# Altium PCB LineDetector.PcbDoc
Units mm, origin at the board's own origin, x right, y up, seen from the top; angles counter-clockwise.
Board outline 160 x 137.5 mm, 2 copper layers (Top Layer, Bottom Layer); 121 components, 71 nets, 295 pads, 0 vias.
Unrouted connection lines stored in the file: 198.
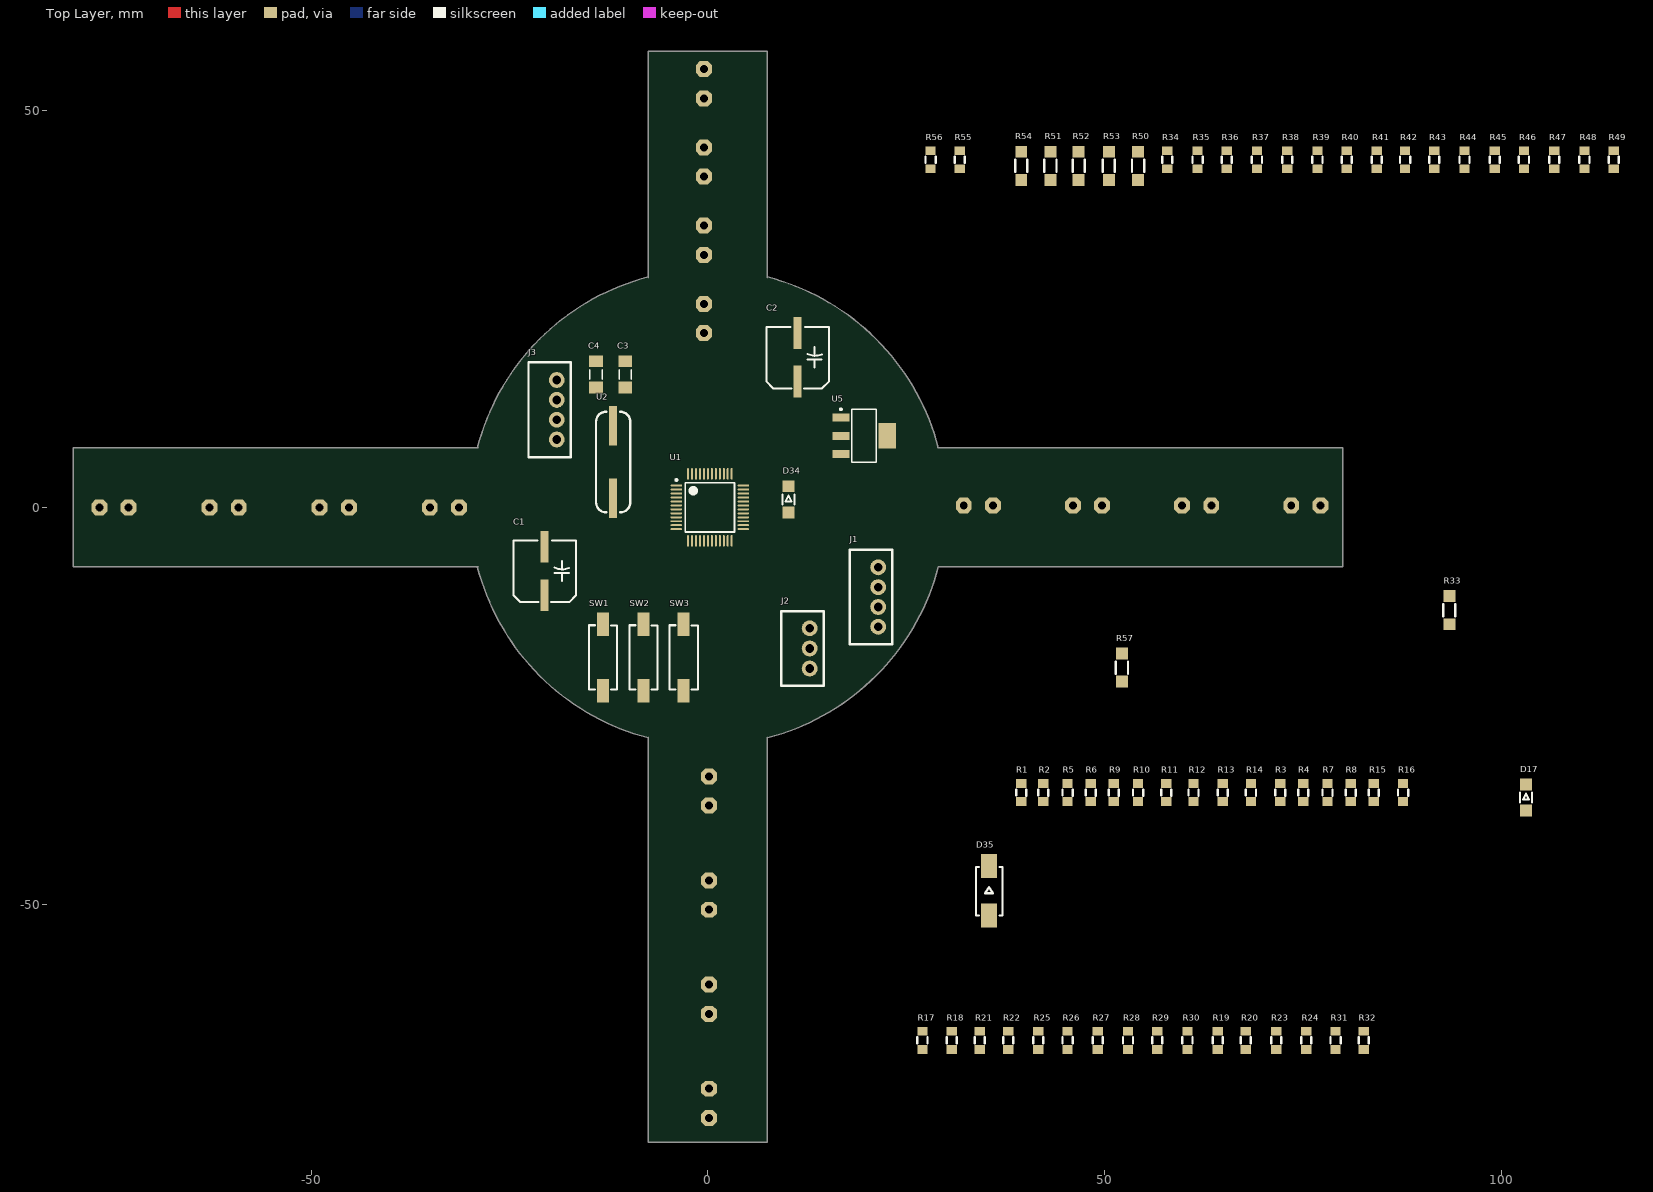
[diagram p0: Top Layer view]
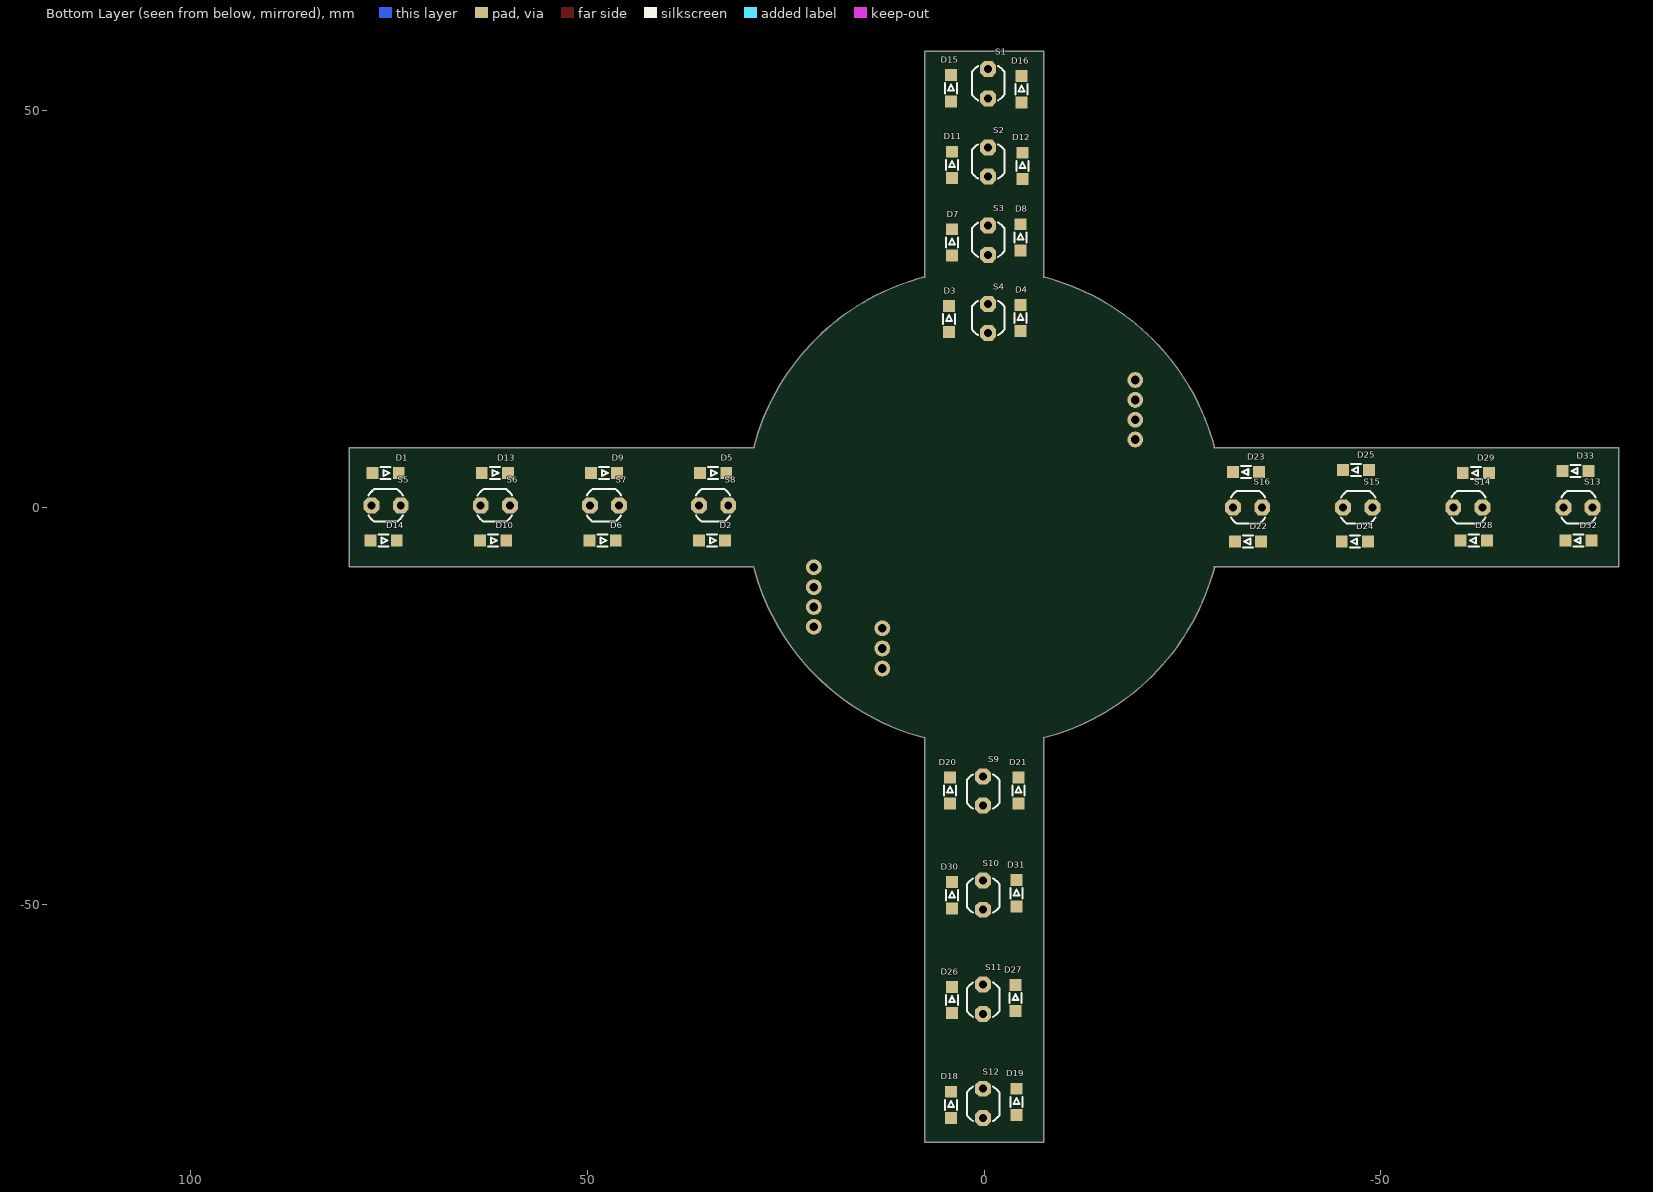
[diagram p1: Bottom Layer view, seen from below]

## Layer stack, top to bottom
Top Solder: solder mask 0.0102, Solder Resist, Dk 3.5
Top Layer: signal copper 0.0356
Dielectric 1: dielectric 0.32, FR-4, Dk 4.8
Bottom Layer: signal copper 0.0356
Bottom Solder: solder mask 0.0102, Solder Resist, Dk 3.5

## Board outline
-80,-7.5 -28.956,-7.5 -29.047,-7.5 ccw(c0,0) -7.491,-29.05 -7.5,-28.956 -7.5,-80 7.5,-80 7.5,-28.956 7.5,-29.047 ccw(c0,0) 29.05,-7.491 29.05,-7.5 80,-7.5 80,7.5 28.956,7.5 29.047,7.5 ccw(c0,0) 7.491,29.05 7.5,28.956 7.5,57.5 -7.5,57.5 -7.5,28.956 -7.5,29.047 ccw(c0,0) -29.05,7.491 -28.956,7.5 -80,7.5

## Design rules (kind name [scope] priority, off if disabled: settings)
Clearance [All] p1: gap=0.7 ignorepadtopadclearanceinfootprint=FALSE except(0: Arc-Hole Track-Hole SMDPad-Hole THPad-Hole Via-Hole Fill-Hole Poly-Hole Region-Hole Text-Hole; 0.25: Arc-Arc Arc-Track Arc-SMDPad Track-Track Track-SMDPad SMDPad-SMDPad; 0.254: Arc-THPad Arc-Via Arc-Text Track-THPad Track-Via Track-Text SMDPad-THPad SMDPad-Via SMDPad-Text THPad-THPad THPad-Via THPad-Text Via-Via Via-Text Fill-Text Poly-Text Region-Text Text-Text)
ComponentClearance [All] p1 off: gap=0.254 collisioncheckmode=3 verticalgap=0.254 showdistances=FALSE
Height [All] p1 off: minheight=0 maxheight=25.4 prefheight=12.7
PlaneConnect [All] p1: planeconnectstyle=Direct reliefexpansion=0.508 reliefentries=4 reliefconductorwidth=0.254 reliefairgap=0.254
PolygonConnect [All] p1: connectstyle=Direct reliefconductorwidth=0.254 reliefentries=4 polygonreliefangle="90 Angle" airgapwidth=0.254
RoutingVias [All] p1: holewidth=0.5 width=0.8 viastyle="Through Hole" minholewidth=0.5 minwidth=0.5 maxholewidth=0.5 maxwidth=1
SolderMaskExpansion [All] p1: expansion=0.102 istentingtop=FALSE
Width [All] p1: maxlimit=5 minlimit=0.25 preferedwidth=1
27 further rules are at their usual default settings.

## Components (designator, comment, footprint, x,y, rotation, side; value= is the part's Value field where it differs from the comment)
C1 "CAP" "CAP SMD 100uF 16V" -20.574,-8.001 r90 top
C2 "CAP" "CAP SMD 100uF 16V" 11.303,18.923 r90 top
C3 "CAP" CAP1206 -10.414,16.764 r90 top
C4 "CAP" CAP1206 -14.097,16.764 r90 top
D1 "LED" "LED RED 1206" 75.438,4.318 r180 bottom
D2 "LED" "LED RED 1206" 34.29,-4.191 r180 bottom
D3 "LED" "LED RED 1206" 4.445,23.749 r90 bottom
D4 "LED" "LED RED 1206" -4.572,23.876 r90 bottom
D5 "LED" "LED RED 1206" 34.163,4.318 r180 bottom
D6 "LED" "LED RED 1206" 48.091,-4.191 r180 bottom
D7 "LED" "LED RED 1206" 4.064,33.401 r90 bottom
D8 "LED" "LED RED 1206" -4.572,34.036 r90 bottom
D9 "LED" "LED RED 1206" 47.921,4.318 r180 bottom
D10 "LED" "LED RED 1206" 61.891,-4.191 r180 bottom
D11 "LED" "LED RED 1206" 4.064,43.18 r90 bottom
D12 "LED" "LED RED 1206" -4.826,43.053 r90 bottom
D13 "LED" "LED RED 1206" 61.68,4.318 r180 bottom
D14 "LED" "LED RED 1206" 75.692,-4.191 r180 bottom
D15 "LED" "LED RED 1206" 4.191,52.832 r90 bottom
D16 "LED" "LED RED 1206" -4.699,52.705 r90 bottom
D17 "LED" "LED GREEN 1206" 103.124,-36.576 r90 top
D18 "LED" "LED RED 1206" 4.191,-75.311 r90 bottom
D19 "LED" "LED RED 1206" -4.064,-74.93 r90 bottom
D20 "LED" "LED RED 1206" 4.318,-35.687 r90 bottom
D21 "LED" "LED RED 1206" -4.318,-35.687 r90 bottom
D22 "LED" "LED RED 1206" -33.274,-4.318 r0 bottom
D23 "LED" "LED RED 1206" -33.02,4.445 r0 bottom
D24 "LED" "LED RED 1206" -46.736,-4.318 r0 bottom
D25 "LED" "LED RED 1206" -46.863,4.699 r0 bottom
D26 "LED" "LED RED 1206" 4.064,-62.103 r90 bottom
D27 "LED" "LED RED 1206" -3.937,-61.849 r90 bottom
D28 "LED" "LED RED 1206" -61.722,-4.191 r0 bottom
D29 "LED" "LED RED 1206" -61.976,4.318 r0 bottom
D30 "LED" "LED RED 1206" 4.064,-48.895 r90 bottom
D31 "LED" "LED RED 1206" -4.064,-48.641 r90 bottom
D32 "LED" "LED RED 1206" -74.93,-4.191 r0 bottom
D33 "LED" "LED RED 1206" -74.549,4.572 r0 bottom
D34 "LED" "LED GREEN 1206" 10.16,1.016 r90 top
D35 "DIODE" Diode 35.433,-48.387 r90 top
J1 "XH4" "XH 4PIN" 20.574,-11.303 r90 top
J2 "XH3" "XH 3PIN" 11.938,-17.78 r90 top
J3 "XH4" "XH 4PIN" -19.939,12.302 r90 top
R1 "RES" RES805 39.497,-35.941 r90 top
R2 "RES" RES805 42.291,-35.941 r90 top
R3 "RES" RES805 72.136,-35.941 r90 top
R4 "RES" RES805 75.057,-35.941 r90 top
R5 "RES" RES805 45.339,-35.941 r90 top
R6 "RES" RES805 48.26,-35.941 r90 top
R7 "RES" RES805 78.105,-35.941 r90 top
R8 "RES" RES805 81.026,-35.941 r90 top
R9 "RES" RES805 51.181,-35.941 r90 top
R10 "RES" RES805 54.229,-35.941 r90 top
R11 "RES" RES805 57.785,-35.941 r90 top
R12 "RES" RES805 61.214,-35.941 r90 top
R13 "RES" RES805 64.897,-35.941 r90 top
R14 "RES" RES805 68.453,-35.941 r90 top
R15 "RES" RES805 83.947,-35.941 r90 top
R16 "RES" RES805 87.63,-35.941 r90 top
R17 "RES" RES805 27.051,-67.183 r90 top
R18 "RES" RES805 30.734,-67.183 r90 top
R19 "RES" RES805 64.262,-67.183 r90 top
R20 "RES" RES805 67.818,-67.183 r90 top
R21 "RES" RES805 34.29,-67.183 r90 top
R22 "RES" RES805 37.846,-67.183 r90 top
R23 "RES" RES805 71.628,-67.183 r90 top
R24 "RES" RES805 75.438,-67.183 r90 top
R25 "RES" RES805 41.656,-67.183 r90 top
R26 "RES" RES805 45.339,-67.183 r90 top
R27 "RES" RES805 49.149,-67.183 r90 top
R28 "RES" RES805 52.959,-67.183 r90 top
R29 "RES" RES805 56.642,-67.183 r90 top
R30 "RES" RES805 60.452,-67.183 r90 top
R31 "RES" RES805 79.121,-67.183 r90 top
R32 "RES" RES805 82.677,-67.183 r90 top
R33 "RES" RES1206 93.472,-12.954 r90 top
R34 "RES" RES805 57.912,43.815 r90 top
R35 "RES" RES805 61.722,43.815 r90 top
R36 "RES" RES805 65.405,43.815 r90 top
R37 "RES" RES805 69.215,43.815 r90 top
R38 "RES" RES805 73.025,43.815 r90 top
R39 "RES" RES805 76.835,43.815 r90 top
R40 "RES" RES805 80.518,43.815 r90 top
R41 "RES" RES805 84.328,43.815 r90 top
R42 "RES" RES805 87.884,43.815 r90 top
R43 "RES" RES805 91.567,43.815 r90 top
R44 "RES" RES805 95.377,43.815 r90 top
R45 "RES" RES805 99.187,43.815 r90 top
R46 "RES" RES805 102.87,43.815 r90 top
R47 "RES" RES805 106.68,43.815 r90 top
R48 "RES" RES805 110.49,43.815 r90 top
R49 "RES" RES805 114.173,43.815 r90 top
R50 "RES" RES1206 54.229,43.053 r90 top
R51 "10K" RES1206 43.18,43.053 r90 top
R52 "10K" RES1206 46.736,43.053 r90 top
R53 "10K" RES1206 50.546,43.053 r90 top
R54 "RES" RES1206 39.497,43.053 r90 top
R55 "RES" RES805 31.75,43.815 r90 top
R56 "RES" RES805 28.067,43.815 r90 top
R57 "RES" RES1206 52.197,-20.193 r90 top
S1 "LDR" LDR -0.508,53.467 r270 bottom
S2 "LDR" LDR -0.508,43.603 r270 bottom
S3 "LDR" LDR -0.508,33.74 r270 bottom
S4 "LDR" LDR -0.508,23.876 r270 bottom
S5 "LDR" LDR 75.438,0.254 r180 bottom
S6 "LDR" LDR 61.68,0.254 r180 bottom
S7 "LDR" LDR 47.921,0.254 r180 bottom
S8 "LDR" LDR 34.163,0.254 r180 bottom
S9 "LDR" LDR 0.127,-35.814 r90 bottom
S10 "LDR" LDR 0.127,-48.937 r90 bottom
S11 "LDR" LDR 0.127,-62.061 r90 bottom
S12 "LDR" LDR 0.127,-75.184 r90 bottom
S13 "LDR" LDR -74.93,0 r0 bottom
S14 "LDR" LDR -61.045,0 r0 bottom
S15 "LDR" LDR -47.159,0 r0 bottom
S16 "LDR" LDR -33.274,0 r0 bottom
SW1 "Switch" pushbutton -13.208,-18.923 r90 top
SW2 "Switch" pushbutton -8.128,-18.923 r90 top
SW3 "Switch" pushbutton -3.048,-18.923 r90 top
U1 "STM32F103C8T6" STM32F103C8T6 0.254,0 r0 top
U2 "Oscilator" "Crystal Oscilator" -11.938,5.715 r270 top
U5 "1117" AMS1117 19.685,9.017 r0 top

## Footprints (in the part's own frame and the unit in brackets; to place one, negate y for a bottom-side part, rotate by r counter-clockwise, add the part's x,y. Pads: shape width x height; smd on the part's side, far side on the other; paste and mask are expansions set on the pad)
AMS1117 [mm] "SOT223, 4-Leads, Body 6.30x7.00mm (avg), Pitch 2.30mm, IPC Medium Density"
  rect 2.15x1 smd: 1(-2.925,2.3) 2(-2.925,0) 3(-2.925,-2.3)
  rect 2.15x3.25 smd: 4(2.925,0)
  silkscreen extent -3.05,-3.35 1.55,3.47, body extent -3.5,-3.35 3.5,3.35, height 1.65
CAP1206 [mm] "Chip Capacitor, 2-Leads, Body 3.20x1.60mm, IPC Medium Density"
  rect 1.5x1.75 smd: 1(-1.651,0) 2(1.651,0)
  silkscreen extent -0.6,-0.77 0.6,0.77, body extent -1.6,-0.8 1.6,0.8, height 1
"CAP SMD 100uF 16V" [mm]
  rect 4x1 smd: 1(3.048,0) 2(-3.07,-0.003)
  silkscreen extent -3.94,-3.97 3.81,3.94, body extent -4.75,-4.15 4.75,4.15, height 10.51
"Crystal Oscilator" [mm]
  rect 5x1 smd: 1(-4.572,0) 2(4.572,0)
  silkscreen extent -6.35,-2.16 6.35,2.16, body extent -6.5,-2.35 6.5,2.35, height 4.21
Diode [mm]
  rect 3x2 smd: 1(-3.048,0) 2(3.175,0)
  silkscreen extent -3.06,-1.69 3.05,1.65, body extent -3.12,-1.78 3.12,1.78, height 2.26
LDR [mm]
  oct 2x2 hole 1: 1(-1.778,0) 2(1.905,0)
  silkscreen extent -2.15,-2.03 2.15,2.03, body extent -2.5,-2.15 2.5,2.15, height 2.9
"LED GREEN 1206" [mm]
  rect 1.5x1.5 smd: 1(-1.651,0) 2(1.651,0)
  silkscreen extent -0.64,-0.76 0.64,0.76, body extent -1.63,-0.83 1.64,0.82, height 0.9
"LED RED 1206" [mm]
  rect 1.5x1.5 smd: 1(-1.651,0) 2(1.651,0)
  silkscreen extent -0.64,-0.76 0.64,0.76, body extent -1.63,-0.83 1.64,0.82, height 0.9
pushbutton [mm]
  rect 3x1.5 smd: 1(-4.191,0) 2(4.191,0)
  silkscreen extent -4.06,-1.78 4.06,1.78, body extent -4.17,-1.82 4.17,1.82, height 4.25
RES805 [mm]
  rect 1.1x1.3 smd: 1(-1.143,0) 2(1.143,0)
  silkscreen extent -0.39,-0.64 0.38,0.64, body extent -1,-0.6 1,0.6, height 0.48
RES1206 [mm]
  rect 1.5x1.5 smd: 1(-1.778,0) 2(1.778,0)
  silkscreen extent -0.76,-0.76 0.76,0.76, body extent -1.58,-0.82 1.58,0.82, height 0.53
STM32F103C8T6 [mm] "TSQFP, 48-Leads, Body 7.00x7.00mm, Pitch 0.50mm, IPC Medium Density"
  oval 1.45x0.254 smd: 1(-4.225,2.75)
  oval 1.45x0.25 smd: 2(-4.225,2.25) 3(-4.225,1.75) 4(-4.225,1.25) 5(-4.225,0.75) 6(-4.225,0.25) 7(-4.225,-0.25) 8(-4.225,-0.75) 9(-4.225,-1.25) 10(-4.225,-1.75) 11(-4.225,-2.25) 12(-4.225,-2.75) 25(4.225,-2.75) 26(4.225,-2.25) 27(4.225,-1.75) 28(4.225,-1.25) 29(4.225,-0.75) 30(4.225,-0.25) 31(4.225,0.25) 32(4.225,0.75) 33(4.225,1.25) 34(4.225,1.75) 35(4.225,2.25) 36(4.225,2.752)
  oval 0.25x1.45 smd: 13(-2.75,-4.225) 14(-2.25,-4.225) 15(-1.75,-4.225) 16(-1.25,-4.225) 17(-0.75,-4.225) 18(-0.25,-4.225) 19(0.25,-4.225) 20(0.75,-4.225) 21(1.25,-4.225) 22(1.75,-4.225) 23(2.25,-4.225) 24(2.75,-4.225) 37(2.75,4.225) 38(2.25,4.225) 39(1.75,4.225) 40(1.25,4.225) 41(0.75,4.225) 42(0.25,4.225) 43(-0.25,4.225) 44(-0.75,4.225) 45(-1.25,4.225) 46(-1.75,4.225) 47(-2.25,4.225) 48(-2.75,4.225)
  silkscreen extent -4.35,-3.1 3.1,3.57, body extent -4.5,-4.5 4.5,4.5, height 1.6
"XH 3PIN" [mm]
  round 2 hole 1.1: 1(-2.54,-0.889) 2(0,-0.889) 3(2.54,-0.889)
  silkscreen extent -4.7,-2.67 4.7,2.67, body extent -4.95,-2.88 4.95,2.88, height 7
"XH 4PIN" [mm]
  round 2 hole 1.1: 1(-3.753,-0.889) 2(-1.253,-0.889) 3(1.247,-0.889) 4(3.747,-0.889)
  silkscreen extent -5.97,-2.67 5.97,2.67, body extent -6.2,-2.88 6.2,2.88, height 7

## Part data
C1 C2: library part "CAP Electrolit SMD", "Capacitor Electrolit SMD"
C3 C4: library part CAP1206, "Capacitor SMD 1206"
D1 D2 D3 D4 D5 D6 D7 D8 D9 D10 D11 D12 D13 D14 D15 D16 D17 D18 D19 D20 D21 D22 D23 D24 D25 D26 D27 D28 D29 D30 D31 D32 D33 D34: library part "LED SMD 1206", "LED SMD 1206"
D35: library part Diode
J1 J3: library part "XH 4PIN", "XH Connector 4pins"
J2: library part "XH 3PIN", "XH Connector 3pins"
R1 R2 R3 R4 R5 R6 R7 R8 R9 R10 R11 R12 R13 R14 R15 R16 R17 R18 R19 R20 R21 R22 R23 R24 R25 R26 R27 R28 R29 R30 R31 R32 R34 R35 R36 R37 R38 R39 R40 R41 R42 R43 R44 R45 R46 R47 R48 R49 R55 R56: library part RES805, "RESISTOR SMD"
R33 R50 R51 R52 R53 R54 R57: library part RES1206, "RESISTOR SMD"
S1 S2 S3 S4 S5 S6 S7 S8 S9 S10 S11 S12 S13 S14 S15 S16: "Light Emmiting Diode - photocell"
SW1 SW2 SW3: library part pushbutton, "Switch SMD Tact"
U1: "STM32F103C8T6 / LQFP48"
U2: library part Crystal, "Crystal Oscilator 8MHz"
U5: library part AMS1117, "3.3v Regulator"

## Nets (pads, with @x,y where several pads share a name; then routed paths per layer and width w, separated by ;. In a path a pad name is that pad's centre, name@x,y a point inside that pad or via, vN(x,y) a via of type N, cw(c..) or ccw(c..) an arc to the next point about the centre after c; other vN are vias at no path point)
+5: J1.4 R55.1 U5.3
A: U1.27
ADC0: R33.1 R50.2 U1.10
ADC1: R54.1 R57.2 U1.11
B: U1.26
BOOT0: R52.1 SW2.2 U1.44
C: U1.25
DOUT: J2.3
GND: C1.1 C2.1 C3.1 C4.1 D17.2 J1.3 J2.1 J3.1 R1.1 R2.1 R3.1 R4.1 R5.1 R6.1 R7.1 R8.1 R9.1 R10.1 R11.1 R12.1 R13.1 R14.1 R15.1 R16.1 R17.1 R18.1 R19.1 R20.1 R21.1 R22.1 R23.1 R24.1 R25.1 R26.1 R27.1 R28.1 R29.1 R30.1 R31.1 R32.1 R34.1 R35.1 R36.1 R37.1 R38.1 R39.1 R40.1 R41.1 R42.1 R43.1 R44.1 R45.1 R46.1 R47.1 R48.1 R49.1 R50.1 R51.2 R52.2 R56.1 R57.1 SW3.1 U1.8 U1.23 U1.35 U1.47 U5.1
NetD1_2: D1.2 R1.2
NetD2_2: D2.2 R2.2
NetD3_2: D3.2 R3.2
NetD4_2: D4.2 R4.2
NetD5_2: D5.2 R5.2
NetD6_2: D6.2 R6.2
NetD7_2: D7.2 R7.2
NetD8_2: D8.2 R8.2
NetD9_2: D9.2 R9.2
NetD10_2: D10.2 R10.2
NetD11_2: D11.2 R11.2
NetD12_2: D12.2 R12.2
NetD13_2: D13.2 R13.2
NetD14_2: D14.2 R14.2
NetD15_2: D15.2 R15.2
NetD16_2: D16.2 R16.2
NetD17_1: D17.1 U1.2
NetD18_2: D18.2 R17.2
NetD19_2: D19.2 R18.2
NetD20_2: D20.2 R19.2
NetD21_2: D21.2 R20.2
NetD22_2: D22.2 R21.2
NetD23_2: D23.2 R22.2
NetD24_2: D24.2 R23.2
NetD25_2: D25.2 R24.2
NetD26_2: D26.2 R25.2
NetD27_2: D27.2 R26.2
NetD28_2: D28.2 R27.2
NetD29_2: D29.2 R28.2
NetD30_2: D30.2 R29.2
NetD31_2: D31.2 R30.2
NetD32_2: D32.2 R31.2
NetD33_2: D33.2 R32.2
NetD34_2: D34.2 R56.2
NetD35_1: D35.1 J3.4
NetR33_2: R33.2
NetR54_2: R54.2
NetU1_5: U1.5 U2.1
NetU1_6: U1.6 U2.2
NRST: R53.2 SW3.2 U1.7
S0: R34.2 S1.2
S1: R35.2 S2.2
S2: R36.2 S3.2
S3: R37.2 S4.2
S4: R38.2 S5.2
S5: R39.2 S6.2
S6: R40.2 S7.2
S7: R41.2 S8.2
S8: R42.2 S9.2
S9: R43.2 S10.2
S10: R44.2 S11.2
S11: R45.2 S12.2
S12: R46.2 S13.2
S13: R47.2 S14.2
S14: R48.2 S15.2
S15: R49.2 S16.2
SCL: J1.2 U1.21
SDA: J1.1 U1.22
SW1: R51.1 SW1.2
SWCLK: J3.2 U1.37
SWIO: J3.3 U1.34
VCC: C1.2 C2.2 C3.2 C4.2 D1.1 D2.1 D3.1 D4.1 D5.1 D6.1 D7.1 D8.1 D9.1 D10.1 D11.1 D12.1 D13.1 D14.1 D15.1 D16.1 D18.1 D19.1 D20.1 D21.1 D22.1 D23.1 D24.1 D25.1 D26.1 D27.1 D28.1 D29.1 D30.1 D31.1 D32.1 D33.1 D34.1 D35.2 J2.2 R53.1 R55.2 S1.1 S2.1 S3.1 S4.1 S5.1 S6.1 S7.1 S8.1 S9.1 S10.1 S11.1 S12.1 S13.1 S14.1 S15.1 S16.1 SW1.1 SW2.1 U1.9 U1.24 U1.36 U1.48 U5.2 U5.4
pads on no net: U1.1 U1.3 U1.4 U1.12 U1.13 U1.14 U1.15 U1.16 U1.17 U1.18 U1.19 U1.20 U1.28 U1.29 U1.30 U1.31 U1.32 U1.33 U1.38 U1.39 U1.40 U1.41 U1.42 U1.43 U1.45 U1.46

## Silkscreen, mask and mechanical layers (free items; w line width, h text height)
Mechanical 1:
  lines w0.3: -29.05,7.491 cw(c0,0) -7.5,29.047 ; -29.047,-7.5 ccw(c0,0) -7.491,-29.05 ; -28.956,-7.5 -80,-7.5 -80,7.5 -28.956,7.5 ; -7.5,-28.956 -7.5,-80 7.5,-80 7.5,-28.956 ; -7.5,28.956 -7.5,57.5 7.5,57.5 7.5,28.956 ; 7.491,29.05 cw(c0,0) 29.047,7.5 ; 7.5,-29.047 ccw(c0,0) 29.05,-7.491 ; 28.956,7.5 80,7.5 80,-7.5 29.05,-7.5